# Altium PCB 数粒机接收板12通道.PcbDoc (part 1 of 5)
Units mm, origin at the board's own origin, x right, y up, seen from the top; angles counter-clockwise.
Board outline 316 x 52 mm, 2 copper layers (Top Layer, Bottom Layer); 209 components, 115 nets, 614 pads, 284 vias.
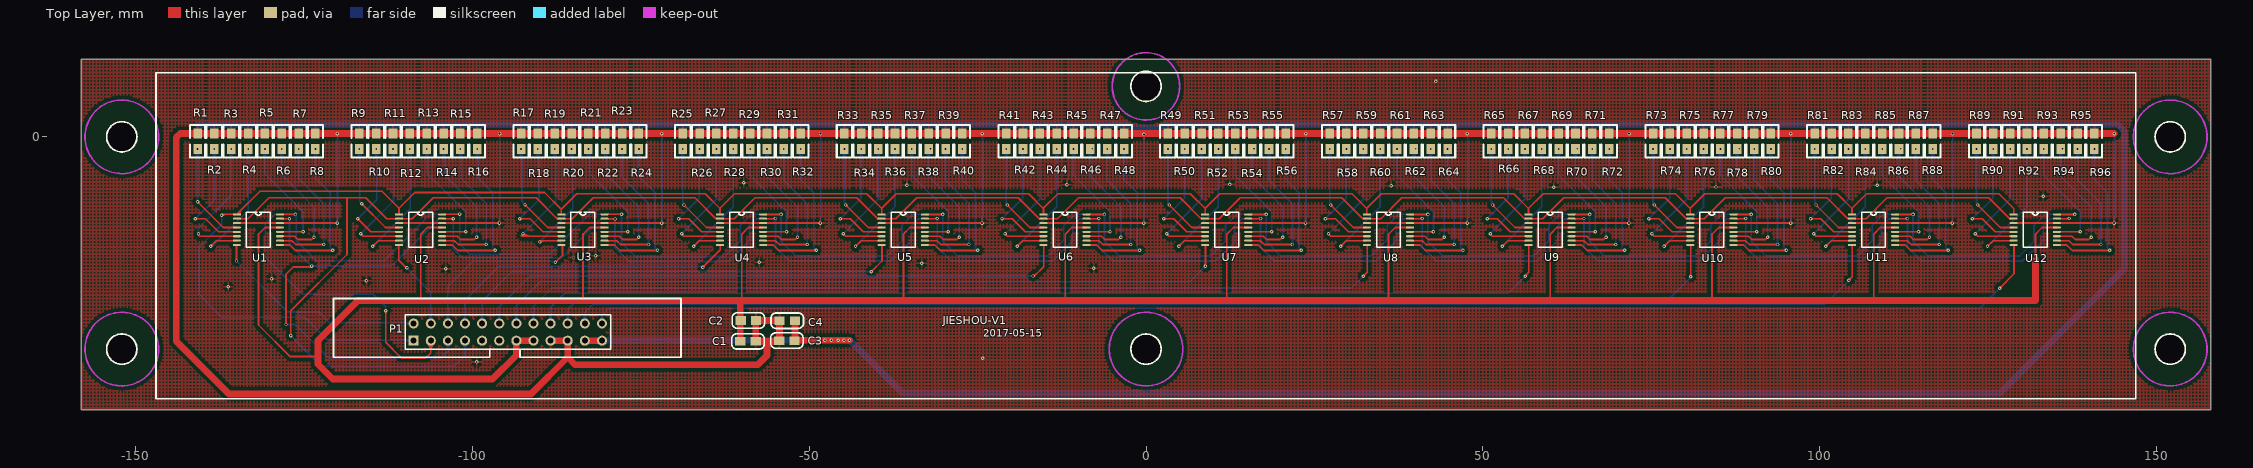
[diagram p0: Top Layer view]
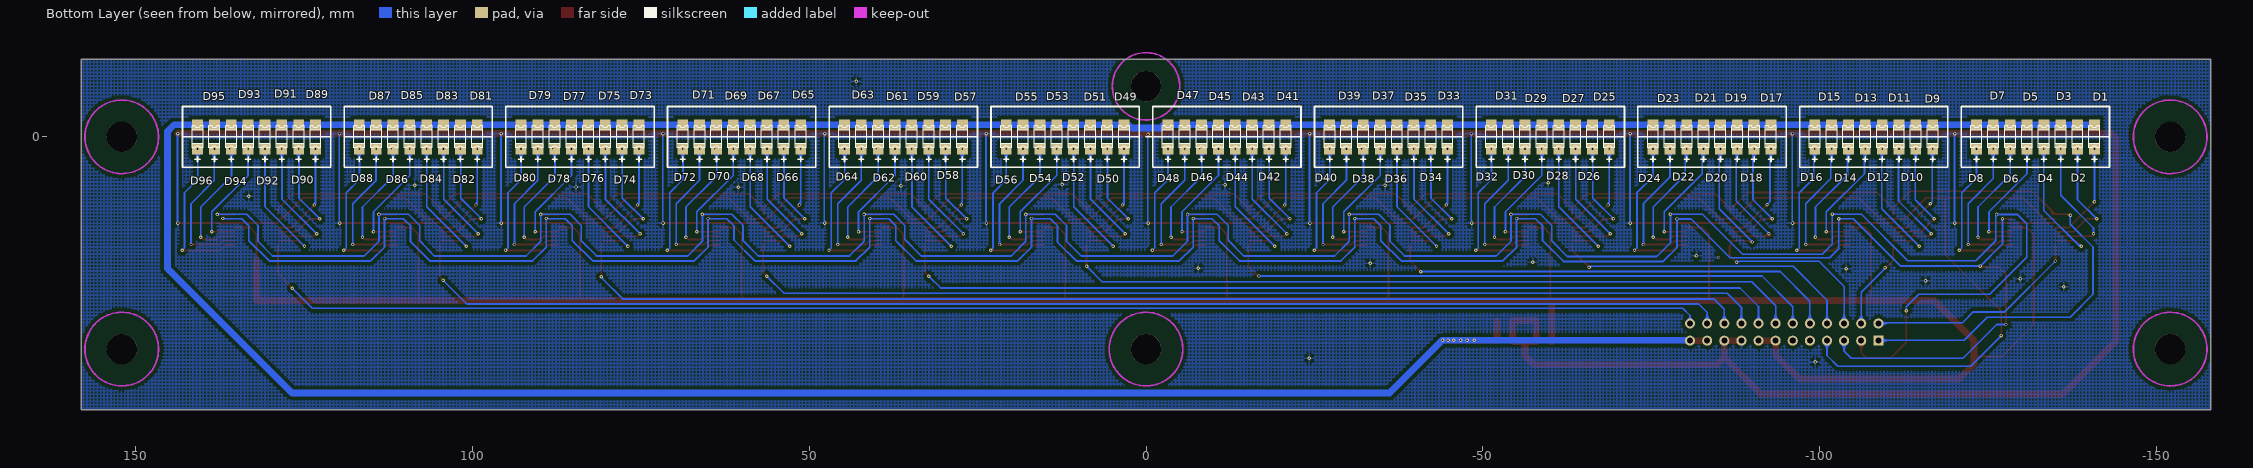
[diagram p1: Bottom Layer view, seen from below]

## Layer stack, top to bottom
Top Layer: signal copper 0.0356
Dielectric: dielectric 0.32, FR-4, Dk 4.8
Bottom Layer: signal copper 0.0356

## Board outline
-158,11.5 -158,-40.5 158,-40.5 158,11.5

## Design rules (kind name [scope] priority, off if disabled: settings)
Clearance Clearance_1 [InPolygon] p1: gap=0.508
Clearance [All] p2: gap=0.2
HoleSize [All] p1 off: absolutevalues=TRUE maxlimit=2.54 minlimit=0.025 maxpercent=80.000 minpercent=20.000
MinimumSolderMaskSliver [All] p1 off: minsoldermaskwidth=0.2
PolygonConnect [All] p1: connectstyle=Relief reliefconductorwidth=0.254 reliefentries=4 polygonreliefangle="90 Angle"
RoutingVias [All] p1: holewidth=0.254 width=0.508 viastyle="Through Hole" minholewidth=0.254 minwidth=0.508 maxholewidth=0.254 maxwidth=0.508
SilkToSilkClearance [All] p1: silktosilkclearance=-10
SilkscreenOverComponentPads [All] p1: minsilkscreentomaskgap=0
SolderMaskExpansion [All] p1: expansion=0.102
TestPointUsage [All] p1: valid=0 allowmultiple=FALSE
Testpoint [All] p1: side=3 testpointundercomponent=TRUE minsize=1.016 maxsize=2.54 preferedsize=1.524 minholesize=0 maxholesize=1.016 preferedholesize=0.813 testpointgrid=0.025 style=297 order=0123456789
Width [All] p1: maxlimit=2 minlimit=0.254 preferedwidth=0.254
20 further rules are at their usual default settings.

## Components (designator, comment, footprint, x,y, rotation, side; value= is the part's Value field where it differs from the comment)
C1 "贴片电容 10uf" 0805c -57.918,-30.357 r180 top
C2 "贴片电容" 0805c -57.868,-27.258 r180 top
C3 "贴片电容 10uf" 0805c -54.439,-30.23 r0 top
C4 "贴片电容" 0805c -54.388,-27.284 r0 top
D1 "红外接收珠子" jieshou1206 -140.75,-1.8 r0 bottom
D2 "红外接收珠子" jieshou1206 -138.25,-1.8 r0 bottom
D3 "红外接收珠子" jieshou1206 -135.75,-1.8 r0 bottom
D4 "红外接收珠子" jieshou1206 -133.25,-1.8 r0 bottom
D5 "红外接收珠子" jieshou1206 -130.75,-1.8 r0 bottom
D6 "红外接收珠子" jieshou1206 -128.25,-1.8 r0 bottom
D7 "红外接收珠子" jieshou1206 -125.75,-1.8 r0 bottom
D8 "红外接收珠子" jieshou1206 -123.25,-1.8 r0 bottom
D9 "红外接收珠子" jieshou1206 -116.75,-1.8 r0 bottom
D10 "红外接收珠子" jieshou1206 -114.25,-1.8 r0 bottom
D11 "红外接收珠子" jieshou1206 -111.75,-1.8 r0 bottom
D12 "红外接收珠子" jieshou1206 -109.25,-1.8 r0 bottom
D13 "红外接收珠子" jieshou1206 -106.75,-1.8 r0 bottom
D14 "红外接收珠子" jieshou1206 -104.25,-1.8 r0 bottom
D15 "红外接收珠子" jieshou1206 -101.75,-1.8 r0 bottom
D16 "红外接收珠子" jieshou1206 -99.25,-1.8 r0 bottom
D17 "红外接收珠子" jieshou1206 -92.75,-1.8 r0 bottom
D18 "红外接收珠子" jieshou1206 -90.25,-1.8 r0 bottom
D19 "红外接收珠子" jieshou1206 -87.75,-1.8 r0 bottom
D20 "红外接收珠子" jieshou1206 -85.25,-1.8 r0 bottom
D21 "红外接收珠子" jieshou1206 -82.75,-1.8 r0 bottom
D22 "红外接收珠子" jieshou1206 -80.25,-1.8 r0 bottom
D23 "红外接收珠子" jieshou1206 -77.75,-1.8 r0 bottom
D24 "红外接收珠子" jieshou1206 -75.25,-1.8 r0 bottom
D25 "红外接收珠子" jieshou1206 -68.75,-1.8 r0 bottom
D26 "红外接收珠子" jieshou1206 -66.25,-1.8 r0 bottom
D27 "红外接收珠子" jieshou1206 -63.75,-1.8 r0 bottom
D28 "红外接收珠子" jieshou1206 -61.25,-1.8 r0 bottom
D29 "红外接收珠子" jieshou1206 -58.75,-1.8 r0 bottom
D30 "红外接收珠子" jieshou1206 -56.25,-1.8 r0 bottom
D31 "红外接收珠子" jieshou1206 -53.75,-1.8 r0 bottom
D32 "红外接收珠子" jieshou1206 -51.25,-1.8 r0 bottom
D33 "红外接收珠子" jieshou1206 -44.75,-1.8 r0 bottom
D34 "红外接收珠子" jieshou1206 -42.25,-1.8 r0 bottom
D35 "红外接收珠子" jieshou1206 -39.75,-1.8 r0 bottom
D36 "红外接收珠子" jieshou1206 -37.25,-1.8 r0 bottom
D37 "红外接收珠子" jieshou1206 -34.75,-1.8 r0 bottom
D38 "红外接收珠子" jieshou1206 -32.25,-1.8 r0 bottom
D39 "红外接收珠子" jieshou1206 -29.75,-1.8 r0 bottom
D40 "红外接收珠子" jieshou1206 -27.25,-1.8 r0 bottom
D41 "红外接收珠子" jieshou1206 -20.75,-1.8 r0 bottom
D42 "红外接收珠子" jieshou1206 -18.25,-1.8 r0 bottom
D43 "红外接收珠子" jieshou1206 -15.75,-1.8 r0 bottom
D44 "红外接收珠子" jieshou1206 -13.25,-1.8 r0 bottom
D45 "红外接收珠子" jieshou1206 -10.75,-1.8 r0 bottom
D46 "红外接收珠子" jieshou1206 -8.25,-1.8 r0 bottom
D47 "红外接收珠子" jieshou1206 -5.75,-1.8 r0 bottom
D48 "红外接收珠子" jieshou1206 -3.25,-1.8 r0 bottom
D49 "红外接收珠子" jieshou1206 3.25,-1.8 r0 bottom
D50 "红外接收珠子" jieshou1206 5.75,-1.8 r0 bottom
D51 "红外接收珠子" jieshou1206 8.25,-1.8 r0 bottom
D52 "红外接收珠子" jieshou1206 10.75,-1.8 r0 bottom
D53 "红外接收珠子" jieshou1206 13.25,-1.8 r0 bottom
D54 "红外接收珠子" jieshou1206 15.75,-1.8 r0 bottom
D55 "红外接收珠子" jieshou1206 18.25,-1.8 r0 bottom
D56 "红外接收珠子" jieshou1206 20.75,-1.8 r0 bottom
D57 "红外接收珠子" jieshou1206 27.25,-1.8 r0 bottom
D58 "红外接收珠子" jieshou1206 29.75,-1.8 r0 bottom
D59 "红外接收珠子" jieshou1206 32.25,-1.8 r0 bottom
D60 "红外接收珠子" jieshou1206 34.75,-1.8 r0 bottom
D61 "红外接收珠子" jieshou1206 37.25,-1.8 r0 bottom
D62 "红外接收珠子" jieshou1206 39.75,-1.8 r0 bottom
D63 "红外接收珠子" jieshou1206 42.25,-1.8 r0 bottom
D64 "红外接收珠子" jieshou1206 44.75,-1.8 r0 bottom
D65 "红外接收珠子" jieshou1206 51.25,-1.8 r0 bottom
D66 "红外接收珠子" jieshou1206 53.75,-1.8 r0 bottom
D67 "红外接收珠子" jieshou1206 56.25,-1.8 r0 bottom
D68 "红外接收珠子" jieshou1206 58.75,-1.8 r0 bottom
D69 "红外接收珠子" jieshou1206 61.25,-1.8 r0 bottom
D70 "红外接收珠子" jieshou1206 63.75,-1.8 r0 bottom
D71 "红外接收珠子" jieshou1206 66.25,-1.8 r0 bottom
D72 "红外接收珠子" jieshou1206 68.75,-1.8 r0 bottom
D73 "红外接收珠子" jieshou1206 75.25,-1.8 r0 bottom
D74 "红外接收珠子" jieshou1206 77.75,-1.8 r0 bottom
D75 "红外接收珠子" jieshou1206 80.25,-1.8 r0 bottom
D76 "红外接收珠子" jieshou1206 82.75,-1.8 r0 bottom
D77 "红外接收珠子" jieshou1206 85.25,-1.8 r0 bottom
D78 "红外接收珠子" jieshou1206 87.75,-1.8 r0 bottom
D79 "红外接收珠子" jieshou1206 90.25,-1.8 r0 bottom
D80 "红外接收珠子" jieshou1206 92.75,-1.8 r0 bottom
D81 "红外接收珠子" jieshou1206 99.25,-1.8 r0 bottom
D82 "红外接收珠子" jieshou1206 101.75,-1.8 r0 bottom
D83 "红外接收珠子" jieshou1206 104.25,-1.8 r0 bottom
D84 "红外接收珠子" jieshou1206 106.75,-1.8 r0 bottom
D85 "红外接收珠子" jieshou1206 109.25,-1.8 r0 bottom
D86 "红外接收珠子" jieshou1206 111.75,-1.8 r0 bottom
D87 "红外接收珠子" jieshou1206 114.25,-1.8 r0 bottom
D88 "红外接收珠子" jieshou1206 116.75,-1.8 r0 bottom
D89 "红外接收珠子" jieshou1206 123.25,-1.8 r0 bottom
D90 "红外接收珠子" jieshou1206 125.75,-1.8 r0 bottom
D91 "红外接收珠子" jieshou1206 128.25,-1.8 r0 bottom
D92 "红外接收珠子" jieshou1206 130.75,-1.8 r0 bottom
D93 "红外接收珠子" jieshou1206 133.25,-1.8 r0 bottom
D94 "红外接收珠子" jieshou1206 135.75,-1.8 r0 bottom
D95 "红外接收珠子" jieshou1206 138.25,-1.8 r0 bottom
D96 "红外接收珠子" jieshou1206 140.75,-1.8 r0 bottom
P1 "牛角插座" HDR2X12 -108.682,-30.248 r0 top
R1 "贴片电阻" 0805r -140.758,0.486 r270 top
R2 "贴片电阻" 0805r -138.258,0.486 r270 top
R3 "贴片电阻" 0805r -135.758,0.486 r270 top
R4 "贴片电阻" 0805r -133.258,0.486 r270 top
R5 "贴片电阻" 0805r -130.758,0.486 r270 top
R6 "贴片电阻" 0805r -128.258,0.486 r270 top
R7 "贴片电阻" 0805r -125.758,0.486 r270 top
R8 "贴片电阻" 0805r -123.258,0.486 r270 top
R9 "贴片电阻" 0805r -116.75,0.486 r270 top
R10 "贴片电阻" 0805r -114.25,0.486 r270 top
R11 "贴片电阻" 0805r -111.75,0.486 r270 top
R12 "贴片电阻" 0805r -109.25,0.486 r270 top
R13 "贴片电阻" 0805r -106.75,0.486 r270 top
R14 "贴片电阻" 0805r -104.25,0.486 r270 top
R15 "贴片电阻" 0805r -101.75,0.486 r270 top
R16 "贴片电阻" 0805r -99.25,0.486 r270 top
R17 "贴片电阻" 0805r -92.75,0.486 r270 top
R18 "贴片电阻" 0805r -90.25,0.486 r270 top
R19 "贴片电阻" 0805r -87.75,0.486 r270 top
R20 "贴片电阻" 0805r -85.25,0.486 r270 top
R21 "贴片电阻" 0805r -82.75,0.486 r270 top
R22 "贴片电阻" 0805r -80.25,0.486 r270 top
R23 "贴片电阻" 0805r -77.75,0.486 r270 top
R24 "贴片电阻" 0805r -75.25,0.486 r270 top
R25 "贴片电阻" 0805r -68.75,0.486 r270 top
R26 "贴片电阻" 0805r -66.25,0.486 r270 top
R27 "贴片电阻" 0805r -63.75,0.486 r270 top
R28 "贴片电阻" 0805r -61.25,0.486 r270 top
R29 "贴片电阻" 0805r -58.75,0.486 r270 top
R30 "贴片电阻" 0805r -56.25,0.486 r270 top
R31 "贴片电阻" 0805r -53.75,0.486 r270 top
R32 "贴片电阻" 0805r -51.25,0.486 r270 top
R33 "贴片电阻" 0805r -44.75,0.486 r270 top
R34 "贴片电阻" 0805r -42.25,0.486 r270 top
R35 "贴片电阻" 0805r -39.75,0.486 r270 top
R36 "贴片电阻" 0805r -37.25,0.486 r270 top
R37 "贴片电阻" 0805r -34.75,0.486 r270 top
R38 "贴片电阻" 0805r -32.25,0.486 r270 top
R39 "贴片电阻" 0805r -29.75,0.486 r270 top
R40 "贴片电阻" 0805r -27.25,0.486 r270 top
R41 "贴片电阻" 0805r -20.75,0.486 r270 top
R42 "贴片电阻" 0805r -18.25,0.486 r270 top
R43 "贴片电阻" 0805r -15.75,0.486 r270 top
R44 "贴片电阻" 0805r -13.25,0.486 r270 top
R45 "贴片电阻" 0805r -10.75,0.486 r270 top
R46 "贴片电阻" 0805r -8.25,0.486 r270 top
R47 "贴片电阻" 0805r -5.75,0.486 r270 top
R48 "贴片电阻" 0805r -3.25,0.486 r270 top
R49 "贴片电阻" 0805r 3.25,0.486 r270 top
R50 "贴片电阻" 0805r 5.75,0.486 r270 top
R51 "贴片电阻" 0805r 8.25,0.486 r270 top
R52 "贴片电阻" 0805r 10.75,0.486 r270 top
R53 "贴片电阻" 0805r 13.25,0.486 r270 top
R54 "贴片电阻" 0805r 15.75,0.486 r270 top
R55 "贴片电阻" 0805r 18.25,0.486 r270 top
R56 "贴片电阻" 0805r 20.75,0.486 r270 top
R57 "贴片电阻" 0805r 27.25,0.486 r270 top
R58 "贴片电阻" 0805r 29.75,0.486 r270 top
R59 "贴片电阻" 0805r 32.25,0.486 r270 top
R60 "贴片电阻" 0805r 34.75,0.486 r270 top
R61 "贴片电阻" 0805r 37.25,0.486 r270 top
R62 "贴片电阻" 0805r 39.75,0.486 r270 top
R63 "贴片电阻" 0805r 42.25,0.486 r270 top
R64 "贴片电阻" 0805r 44.75,0.486 r270 top
R65 "贴片电阻" 0805r 51.242,0.486 r270 top
R66 "贴片电阻" 0805r 53.742,0.486 r270 top
R67 "贴片电阻" 0805r 56.242,0.486 r270 top
R68 "贴片电阻" 0805r 58.742,0.486 r270 top
R69 "贴片电阻" 0805r 61.242,0.486 r270 top
R70 "贴片电阻" 0805r 63.742,0.486 r270 top
R71 "贴片电阻" 0805r 66.242,0.486 r270 top
R72 "贴片电阻" 0805r 68.742,0.486 r270 top
R73 "贴片电阻" 0805r 75.25,0.486 r270 top
R74 "贴片电阻" 0805r 77.75,0.486 r270 top
R75 "贴片电阻" 0805r 80.25,0.486 r270 top
R76 "贴片电阻" 0805r 82.75,0.486 r270 top
R77 "贴片电阻" 0805r 85.25,0.486 r270 top
R78 "贴片电阻" 0805r 87.75,0.486 r270 top
R79 "贴片电阻" 0805r 90.25,0.486 r270 top
R80 "贴片电阻" 0805r 92.75,0.486 r270 top
R81 "贴片电阻" 0805r 99.25,0.486 r270 top
R82 "贴片电阻" 0805r 101.75,0.486 r270 top
R83 "贴片电阻" 0805r 104.25,0.486 r270 top
R84 "贴片电阻" 0805r 106.75,0.486 r270 top
R85 "贴片电阻" 0805r 109.25,0.486 r270 top
R86 "贴片电阻" 0805r 111.75,0.486 r270 top
R87 "贴片电阻" 0805r 114.25,0.486 r270 top
R88 "贴片电阻" 0805r 116.75,0.486 r270 top
R89 "贴片电阻" 0805r 123.25,0.486 r270 top
R90 "贴片电阻" 0805r 125.75,0.486 r270 top
R91 "贴片电阻" 0805r 128.25,0.486 r270 top
R92 "贴片电阻" 0805r 130.75,0.486 r270 top
R93 "贴片电阻" 0805r 133.25,0.486 r270 top
R94 "贴片电阻" 0805r 135.75,0.486 r270 top
R95 "贴片电阻" 0805r 138.25,0.486 r270 top
R96 "贴片电阻" 0805r 140.75,0.486 r270 top
U1 "集成电路" TSSOP16 -134.931,-11.5 r0 top
U2 "集成电路" TSSOP16 -110.852,-11.5 r0 top
U3 "集成电路" TSSOP16 -86.773,-11.5 r0 top
U4 "集成电路" TSSOP16 -63.227,-11.5 r0 top
U5 "集成电路" TSSOP16 -39.227,-11.5 r0 top
U6 "集成电路" TSSOP16 -15.227,-11.5 r0 top
U7 "集成电路" TSSOP16 8.773,-11.5 r0 top
U8 "集成电路" TSSOP16 32.773,-11.5 r0 top
U9 "集成电路" TSSOP16 56.773,-11.5 r0 top
U10 "集成电路" TSSOP16 80.773,-11.5 r0 top
U11 "集成电路" TSSOP16 104.773,-11.5 r0 top
U12 "集成电路" TSSOP16 128.773,-11.5 r0 top

## Footprints (in the part's own frame and the unit in brackets; to place one, negate y for a bottom-side part, rotate by r counter-clockwise, add the part's x,y. Pads: shape width x height; smd on the part's side, far side on the other; paste and mask are expansions set on the pad)
0805c [mil]
  rect 60x50 smd: 1(0,0) 2(90,0)
  silkscreen extent -50,-45 140,45
0805r [mil]
  rect 60x50 smd: 1(0,0) 2(90,0)
  silkscreen extent -50,-45 140,45
HDR2X12 [mm] "Connector; Header; 12x2 Position"
  rect 1.5x1.5 hole 0.9: 1(0,0)
  round 1.5 hole 0.9: 2(0,2.54) 3(2.54,0) 4(2.54,2.54) 5(5.08,0) 6(5.08,2.54) 7(7.62,0) 8(7.62,2.54) 9(10.16,0) 10(10.16,2.54) 11(12.7,0) 12(12.7,2.54) 13(15.24,0) 14(15.24,2.54) 15(17.78,0) 16(17.78,2.54) 17(20.32,0) 18(20.32,2.54) 19(22.86,0) 20(22.86,2.54) 21(25.4,0) 22(25.4,2.54) 23(27.94,0) 24(27.94,2.54)
  silkscreen extent -1.27,-1.27 29.21,3.81
jieshou1206 [mm]
  rect 1.6x1.6 smd: 1(0,0) 2(0,-3.6)
  silkscreen extent -0.8,-3.41 0.82,1.9
TSSOP16 [mm] "ADG708"
  rect 1.2x0.3 smd: 1(0,0)
  oval 1.2x0.3 smd: 2(0,-0.65) 3(0,-1.3) 4(0,-1.95) 5(0,-2.6) 6(0,-3.25) 7(0,-3.9) 8(0,-4.55) 9(6.4,-4.55) 10(6.4,-3.9) 11(6.4,-3.25) 12(6.4,-2.6) 13(6.4,-1.95) 14(6.4,-1.3) 15(6.4,-0.65) 16(6.4,0)
  silkscreen extent 1.43,-4.88 4.96,0.33

## Part data
C1 C2 C3 C4: library part Cap, "Capacitor"
D1 D2 D3 D4 D5 D6 D7 D8 D9 D10 D11 D12 D13 D14 D15 D16 D17 D18 D19 D20 D21 D22 D23 D24 D25 D26 D27 D28 D29 D30 D31 D32 D33 D34 D35 D36 D37 D38 D39 D40 D41 D42 D43 D44 D45 D46 D47 D48 D49 D50 D51 D52 D53 D54 D55 D56 D57 D58 D59 D60 D61 D62 D63 D64 D65 D66 D67 D68 D69 D70 D71 D72 D73 D74 D75 D76 D77 D78 D79 D80 D81 D82 D83 D84 D85 D86 D87 D88 D89 D90 D91 D92 D93 D94 D95 D96: library part LED0, "PD15-21B/TR8"
P1: library part "Header 12X2", "Header, 12-Pin, Dual row"
R1 R2 R3 R4 R5 R6 R7 R8 R9 R10 R11 R12 R13 R14 R15 R16 R17 R18 R19 R20 R21 R22 R23 R24 R25 R26 R27 R28 R29 R30 R31 R32: library part Res3
R33 R34 R35 R36 R37 R38 R39 R40 R41 R42 R43 R44 R45 R46 R47 R48 R49 R50 R51 R52 R53 R54 R55 R56 R57 R58 R59 R60 R61 R62 R63 R64 R65 R66 R67 R68 R69 R70 R71 R72 R73 R74 R75 R76 R77 R78 R79 R80 R81 R82 R83 R84 R85 R86 R87 R88 R89 R90 R91 R92 R93 R94 R95 R96: library part Res3, "电阻"
U1 U2 U3 U4: library part ADG708
U5 U6 U7 U8 U9 U10 U11 U12: library part ADG708, "ADG708BRU-REEL"

## Free pads (board coordinates)
  round 4.5 hole 4.5 unplated: 1(-152,0) 2(-152,-31.5) 2(0,-31.5) 2(0,7.5) 5(152,0) 6(152,-31.5)

## Via types
v1: diameter 0.508, hole 0.254, Top Layer to Bottom Layer, 284 vias

## Nets (pads, with @x,y where several pads share a name; then routed paths per layer and width w, separated by ;. In a path a pad name is that pad's centre, name@x,y a point inside that pad or via, vN(x,y) a via of type N, cw(c..) or ccw(c..) an arc to the next point about the centre after c; other vN are vias at no path point)
A0: P1.1 U1.1 U2.1 U3.1 U4.1 U5.1 U6.1 U7.1 U8.1 U9.1 U10.1 U11.1 U12.1 | length 365.9
  Top Layer w0.254: v1(-137.192,-11.637) -137.055,-11.5 U1.1@-134.931,-11.5 -131.487,-8.056 -113.392,-8.056 -110.852,-10.596 ; U2.1@-110.852,-11.5 -110.852,-10.596 ; U3.1@-86.773,-11.5 -86.773,-10.748 ; U4.1@-63.227,-11.5 -63.227,-10.6 -61.064,-8.437 -41.418,-8.437 -39.227,-10.628 ; -63.227,-10.628 -65.418,-8.437 -84.461,-8.437 -86.773,-10.748 ; -15.227,-10.628 -17.418,-8.437 -37.064,-8.437 -39.227,-10.6 ; 8.773,-10.628 6.582,-8.437 -13.064,-8.437 -15.227,-10.6 ; 32.773,-10.628 30.582,-8.437 10.936,-8.437 8.773,-10.6 ; 56.773,-10.628 54.582,-8.437 34.936,-8.437 32.773,-10.6 ; 80.773,-10.628 78.582,-8.437 58.936,-8.437 56.773,-10.6 ; 104.773,-10.628 102.582,-8.437 82.936,-8.437 80.773,-10.6 ; U12.1@128.773,-11.5 128.773,-10.6 ; 128.773,-10.628 126.582,-8.437 106.936,-8.437 104.773,-10.6 ; v1@-137.102,-11.727 cw(c-136.554,-12.275) -136.554,-11.5 ; v1@-137.102,-11.727 cw(c-136.554,-12.275) -136.554,-11.5 ; v1@-137.102,-11.727 cw(c-136.554,-12.275) -136.554,-11.5 ; -110.852,-10.596 -108.515,-8.259 -89.262,-8.259 -86.773,-10.748 ; -39.227,-10.6 U5.1@-39.227,-11.5 -39.227,-10.6 ; -15.227,-10.6 U6.1@-15.227,-11.5 -15.227,-10.6 ; 8.773,-10.6 U7.1@8.773,-11.5 8.773,-10.6 ; 32.773,-10.6 U8.1@32.773,-11.5 32.773,-10.6 ; 56.773,-10.6 U9.1@56.773,-11.5 56.773,-10.6 ; 80.773,-10.6 U10.1@80.773,-11.5 80.773,-10.6 ; 104.773,-10.6 U11.1@104.773,-11.5 104.773,-10.6 ; U1.1@-134.712,-11.5 cw(c-134.184,-11.5) -134.557,-11.126 ccw(c-134.184,-11.5) U1.1@-134.712,-11.5 ; U1.1@-134.458,-11.5 cw(c-133.316,-11.5) -134.124,-10.693 ccw(c-133.316,-11.5) U1.1@-134.458,-11.5
  Bottom Layer w0.254: v1(-137.192,-11.637) -137.166,-11.663 -137.166,-12.958 -140.545,-16.336 -140.545,-23.372 -137.141,-26.776 -124.854,-26.776 -121.458,-30.172 P1.1@-108.682,-30.172 ; v1@-137.282,-11.727 cw(c-137.56,-12.005) -137.166,-12.005 ; v1@-137.282,-11.727 cw(c-137.56,-12.005) -137.166,-12.005 ; v1@-137.282,-11.727 cw(c-137.56,-12.005) -137.166,-12.005 ; -110.37,-30.172 cw(c-110.37,-31.936) P1.1@-109.122,-30.689 ; -110.37,-30.172 cw(c-110.37,-31.936) P1.1@-109.122,-30.689 ; -110.37,-30.172 cw(c-110.37,-31.936) P1.1@-109.122,-30.689 ; -110.002,-30.172 ccw(c-110.002,-28.928) P1.1@-109.122,-29.807 ; -110.002,-30.172 ccw(c-110.002,-28.928) P1.1@-109.122,-29.807 ; -110.002,-30.172 ccw(c-110.002,-28.928) P1.1@-109.122,-29.807 ; -109.757,-30.172 cw(c-109.757,-31.323) P1.1@-108.943,-30.509 ; -109.757,-30.172 cw(c-109.757,-31.323) P1.1@-108.943,-30.509 ; -109.757,-30.172 cw(c-109.757,-31.323) P1.1@-108.943,-30.509
A1: P1.3 U1.16 U2.16 U3.16 U4.16 U5.16 U6.16 U7.16 U8.16 U9.16 U10.16 U11.16 U12.16 | length 486.3
  Top Layer w0.254: U1.16@-128.531,-11.5 -126.229,-11.5 v1(-126.219,-11.51) ; v1(-112.847,-25.828) -112.847,-30.502 -110.536,-32.813 -106.878,-32.813 -106.142,-32.077 P1.3@-106.142,-30.248 ; U2.16@-104.452,-11.5 v1@-101.921,-11.5 ; U3.16@-80.373,-11.5 -77.847,-11.5 v1(-77.832,-11.485) ; U4.16@-56.827,-11.5 -56.817,-11.51 v1(-54.159,-11.51) ; U5.16@-32.827,-11.5 -32.817,-11.51 v1(-30.159,-11.51) ; U6.16@-8.827,-11.5 -8.817,-11.51 v1(-6.159,-11.51) ; U7.16@15.173,-11.5 15.183,-11.51 v1(17.841,-11.51) ; U8.16@39.173,-11.5 39.183,-11.51 v1(41.841,-11.51) ; U9.16@63.173,-11.5 63.183,-11.51 v1(65.841,-11.51) ; U10.16@87.173,-11.5 87.183,-11.51 v1(89.841,-11.51) ; U11.16@111.173,-11.5 111.183,-11.51 v1(113.841,-11.51) ; U12.16@135.173,-11.5 135.183,-11.51 v1(137.841,-11.51) ; v1@-112.937,-25.918 cw(c-113.154,-26.135) -112.847,-26.135 ; v1@-112.937,-25.918 cw(c-113.154,-26.135) -112.847,-26.135 ; v1@-112.937,-25.918 cw(c-113.154,-26.135) -112.847,-26.135 ; -112.847,-26.135 cw(c-112.541,-26.135) v1@-112.758,-25.918 ; -112.847,-26.135 cw(c-112.541,-26.135) v1@-112.758,-25.918 ; -112.847,-26.135 cw(c-112.541,-26.135) v1@-112.758,-25.918 ; P1.3@-106.582,-30.689 cw(c-107.646,-31.752) -106.142,-31.752 ; P1.3@-106.582,-30.689 cw(c-107.646,-31.752) -106.142,-31.752 ; P1.3@-106.582,-30.689 cw(c-107.646,-31.752) -106.142,-31.752 ; P1.3@-106.403,-30.509 cw(c-107.033,-31.139) -106.142,-31.139 ; P1.3@-106.403,-30.509 cw(c-107.033,-31.139) -106.142,-31.139 ; P1.3@-106.403,-30.509 cw(c-107.033,-31.139) -106.142,-31.139 ; -106.142,-31.752 cw(c-104.638,-31.752) P1.3@-105.701,-30.689 ; -106.142,-31.752 cw(c-104.638,-31.752) P1.3@-105.701,-30.689 ; -106.142,-31.752 cw(c-104.638,-31.752) P1.3@-105.701,-30.689 ; -106.142,-31.139 cw(c-105.251,-31.139) P1.3@-105.881,-30.509 ; -106.142,-31.139 cw(c-105.251,-31.139) P1.3@-105.881,-30.509 ; -106.142,-31.139 cw(c-105.251,-31.139) P1.3@-105.881,-30.509 ; -78.175,-11.5 ccw(c-78.175,-11.142) v1@-77.922,-11.395 ; -78.175,-11.5 ccw(c-78.175,-11.142) v1@-77.922,-11.395 ; -78.175,-11.5 ccw(c-78.175,-11.142) v1@-77.922,-11.395 ; -78.102,-11.5 cw(c-78.102,-11.755) v1@-77.922,-11.575 ; -78.102,-11.5 cw(c-78.102,-11.755) v1@-77.922,-11.575 ; -78.102,-11.5 cw(c-78.102,-11.755) v1@-77.922,-11.575 ; -54.466,-11.51 cw(c-54.466,-11.817) -54.249,-11.6 ccw(c-54.466,-11.817) -54.466,-11.51 ; -54.466,-11.51 ccw(c-54.466,-11.204) -54.249,-11.42 cw(c-54.466,-11.204) -54.466,-11.51 ; -30.466,-11.51 cw(c-30.466,-11.817) -30.249,-11.6 ccw(c-30.466,-11.817) -30.466,-11.51 ; -30.466,-11.51 ccw(c-30.466,-11.204) -30.249,-11.42 cw(c-30.466,-11.204) -30.466,-11.51 ; -6.466,-11.51 cw(c-6.466,-11.817) -6.249,-11.6 ccw(c-6.466,-11.817) -6.466,-11.51 ; -6.466,-11.51 ccw(c-6.466,-11.204) -6.249,-11.42 cw(c-6.466,-11.204) -6.466,-11.51 ; 17.534,-11.51 cw(c17.534,-11.817) 17.751,-11.6 ccw(c17.534,-11.817) 17.534,-11.51 ; 17.534,-11.51 ccw(c17.534,-11.204) 17.751,-11.42 cw(c17.534,-11.204) 17.534,-11.51 ; 41.534,-11.51 cw(c41.534,-11.817) 41.751,-11.6 ccw(c41.534,-11.817) 41.534,-11.51 ; 41.534,-11.51 ccw(c41.534,-11.204) 41.751,-11.42 cw(c41.534,-11.204) 41.534,-11.51 ; 65.534,-11.51 cw(c65.534,-11.817) 65.751,-11.6 ccw(c65.534,-11.817) 65.534,-11.51 ; 65.534,-11.51 ccw(c65.534,-11.204) 65.751,-11.42 cw(c65.534,-11.204) 65.534,-11.51 ; 89.534,-11.51 cw(c89.534,-11.817) 89.751,-11.6 ccw(c89.534,-11.817) 89.534,-11.51 ; 89.534,-11.51 ccw(c89.534,-11.204) 89.751,-11.42 cw(c89.534,-11.204) 89.534,-11.51 ; 113.534,-11.51 cw(c113.534,-11.817) 113.751,-11.6 ccw(c113.534,-11.817) 113.534,-11.51 ; 113.534,-11.51 ccw(c113.534,-11.204) 113.751,-11.42 cw(c113.534,-11.204) 113.534,-11.51 ; 137.534,-11.51 cw(c137.534,-11.817) 137.751,-11.6 ccw(c137.534,-11.817) 137.534,-11.51 ; 137.534,-11.51 ccw(c137.534,-11.204) 137.751,-11.42 cw(c137.534,-11.204) 137.534,-11.51 ; -126.55,-11.5 cw(c-126.55,-11.841) -126.309,-11.6 ccw(c-126.55,-11.841) -126.55,-11.5 ; -126.501,-11.5 ccw(c-126.501,-11.228) -126.309,-11.42 cw(c-126.501,-11.228) -126.501,-11.5 ; -102.265,-11.5 ccw(c-102.265,-11.055) -101.95,-11.37 cw(c-102.265,-11.055) -102.265,-11.5
  Bottom Layer w0.254: v1(-112.847,-25.828) -112.847,-25.205 -114.68,-23.372 -125.203,-23.372 -130.689,-17.886 -130.689,-12.907 -129.292,-11.51 v1(-126.219,-11.51) -126.092,-11.637 -126.092,-15.396 -123.12,-18.368 -113.062,-18.368 -106.194,-11.5 -101.901,-11.5 v1(-101.86,-11.459) -101.86,-15.904 -100.34,-17.425 -88.522,-17.425 -82.582,-11.485 v1(-77.832,-11.485) -77.832,-15.701 -75.782,-17.751 -62.534,-17.751 -60.204,-15.422 -60.204,-13.161 -58.543,-11.5 v1@-54.169,-11.5 ; v1@-54.169,-11.51 v1@-54.169,-11.5 ; v1(-30.159,-11.51) v1@-30.169,-11.5 ; v1(-6.159,-11.51) v1@-6.169,-11.5 ; v1(17.841,-11.51) v1@17.831,-11.5 ; v1(41.841,-11.51) v1@41.831,-11.5 ; v1(65.841,-11.51) v1@65.831,-11.5 ; v1(89.841,-11.51) v1@89.831,-11.5 ; v1(113.841,-11.51) v1@113.831,-11.5 ; v1(137.841,-11.51) 137.831,-11.5 133.457,-11.5 131.796,-13.161 131.796,-15.505 129.625,-17.675 116.018,-17.675 113.831,-15.488 v1@113.831,-11.5 ; -126.526,-11.51 cw(c-126.526,-11.817) v1@-126.309,-11.6 ; -126.526,-11.51 ccw(c-126.526,-11.204) -126.309,-11.42 cw(c-126.526,-11.204) -126.526,-11.51 ; -126.526,-11.51 cw(c-126.526,-11.817) v1@-126.309,-11.6 ; v1@-126.309,-11.6 cw(c-126.832,-12.123) -126.092,-12.123 ; v1@-126.309,-11.6 cw(c-126.832,-12.123) -126.092,-12.123 ; v1@-126.309,-11.6 cw(c-126.832,-12.123) -126.092,-12.123 ; v1@-112.937,-25.739 ccw(c-113.154,-25.522) -112.847,-25.522 ; v1@-112.937,-25.739 ccw(c-113.154,-25.522) -112.847,-25.522 ; v1@-112.937,-25.739 ccw(c-113.154,-25.522) -112.847,-25.522 ; -112.847,-25.522 ccw(c-112.541,-25.522) v1@-112.758,-25.739 ; -112.847,-25.522 ccw(c-112.541,-25.522) v1@-112.758,-25.739 ; -112.847,-25.522 ccw(c-112.541,-25.522) v1@-112.758,-25.739 ; v1@-101.95,-11.549 cw(c-102.167,-11.766) -101.86,-11.766 ; v1@-101.95,-11.549 cw(c-102.167,-11.766) -101.86,-11.766 ; v1@-101.95,-11.549 cw(c-102.167,-11.766) -101.86,-11.766 ; -101.86,-11.766 cw(c-101.554,-11.766) v1@-101.771,-11.549 ; -101.86,-11.766 cw(c-101.554,-11.766) v1@-101.771,-11.549 ; -101.86,-11.766 cw(c-101.554,-11.766) v1@-101.771,-11.549 ; -78.139,-11.485 cw(c-78.139,-11.791) v1@-77.922,-11.575 ; -78.139,-11.485 ccw(c-78.139,-11.178) v1@-77.922,-11.395 ; -78.139,-11.485 cw(c-78.139,-11.791) v1@-77.922,-11.575 ; -78.139,-11.485 ccw(c-78.139,-11.178) v1@-77.922,-11.395 ; -78.139,-11.485 ccw(c-78.139,-11.178) v1@-77.922,-11.395 ; -78.139,-11.485 cw(c-78.139,-11.791) v1@-77.922,-11.575 ; v1@-77.922,-11.575 cw(c-78.139,-11.791) -77.832,-11.791 ; v1@-77.922,-11.575 cw(c-78.139,-11.791) -77.832,-11.791 ; v1@-77.922,-11.575 cw(c-78.139,-11.791) -77.832,-11.791 ; -77.832,-11.791 cw(c-77.525,-11.791) v1@-77.742,-11.575 ; -77.832,-11.791 cw(c-77.525,-11.791) v1@-77.742,-11.575 ; -77.832,-11.791 cw(c-77.525,-11.791) v1@-77.742,-11.575 ; v1@-54.249,-11.6 cw(c-54.466,-11.817) -54.159,-11.817 ; v1@-54.249,-11.6 ccw(c-54.49,-11.841) -54.49,-11.5 cw(c-54.49,-11.841) v1@-54.249,-11.6 ; v1@-54.249,-11.6 cw(c-54.466,-11.817) -54.159,-11.817 ; v1@-54.169,-11.5 v1(-54.159,-11.51) -54.159,-15.478 -54.169,-15.488 -51.982,-17.675 -38.375,-17.675 -36.204,-15.505 -36.204,-13.161 -34.543,-11.5 v1@-30.169,-11.5 ; -54.159,-11.817 cw(c-53.853,-11.817) -54.069,-11.6 ccw(c-53.853,-11.817) -54.159,-11.817 ; v1@-30.249,-11.6 ccw(c-30.49,-11.841) -30.49,-11.5 cw(c-30.49,-11.841) v1@-30.249,-11.6 ; v1@-30.249,-11.6 cw(c-30.441,-11.792) -30.169,-11.792 ccw(c-30.441,-11.792) v1@-30.249,-11.6 ; v1@-30.169,-11.5 -30.169,-15.488 -27.982,-17.675 -14.524,-17.675 -12.204,-15.355 -12.204,-13.161 -10.543,-11.5 v1@-6.169,-11.5 ; v1@-6.249,-11.6 ccw(c-6.49,-11.841) -6.49,-11.5 cw(c-6.49,-11.841) v1@-6.249,-11.6 ; v1@-6.249,-11.6 cw(c-6.441,-11.792) -6.169,-11.792 ccw(c-6.441,-11.792) v1@-6.249,-11.6 ; v1@-6.169,-11.5 -6.169,-15.488 -3.982,-17.675 9.603,-17.675 11.796,-15.482 11.796,-13.161 13.457,-11.5 v1@17.831,-11.5 ; v1@17.751,-11.6 ccw(c17.51,-11.841) 17.51,-11.5 cw(c17.51,-11.841) v1@17.751,-11.6 ; v1@17.751,-11.6 cw(c17.559,-11.792) 17.831,-11.792 ccw(c17.559,-11.792) v1@17.751,-11.6 ; v1@17.831,-11.5 17.831,-15.488 20.018,-17.675 33.33,-17.675 35.796,-15.209 35.796,-13.161 37.457,-11.5 v1@41.831,-11.5 ; v1@41.751,-11.6 ccw(c41.51,-11.841) 41.51,-11.5 cw(c41.51,-11.841) v1@41.751,-11.6 ; v1@41.751,-11.6 cw(c41.559,-11.792) 41.831,-11.792 ccw(c41.559,-11.792) v1@41.751,-11.6 ; v1@41.831,-11.5 41.831,-15.488 44.018,-17.675 57.536,-17.675 59.796,-15.415 59.796,-13.161 61.457,-11.5 v1@65.831,-11.5 ; v1@65.751,-11.6 cw(c65.559,-11.792) 65.831,-11.792 ccw(c65.559,-11.792) v1@65.751,-11.6 ; v1@65.751,-11.6 ccw(c65.51,-11.841) 65.51,-11.5 cw(c65.51,-11.841) v1@65.751,-11.6 ; v1@65.831,-11.5 65.831,-15.488 68.018,-17.675 81.539,-17.675 83.796,-15.418 83.796,-13.161 85.457,-11.5 v1@89.831,-11.5 ; v1@89.751,-11.6 ccw(c89.51,-11.841) 89.51,-11.5 cw(c89.51,-11.841) v1@89.751,-11.6 ; v1@89.751,-11.6 cw(c89.559,-11.792) 89.831,-11.792 ccw(c89.559,-11.792) v1@89.751,-11.6 ; v1@89.831,-11.5 89.831,-15.488 92.018,-17.675 105.625,-17.675 107.796,-15.422 107.796,-13.161 109.457,-11.5 v1@113.831,-11.5 ; v1@113.751,-11.6 ccw(c113.51,-11.841) 113.51,-11.5 cw(c113.51,-11.841) v1@113.751,-11.6 ; v1@113.751,-11.6 cw(c113.559,-11.792) 113.831,-11.792 ccw(c113.559,-11.792) v1@113.751,-11.6 ; -102.265,-11.5 ccw(c-102.265,-11.055) -101.95,-11.37 cw(c-102.265,-11.055) -102.265,-11.5 ; -54.441,-11.5 ccw(c-54.441,-11.228) -54.249,-11.42 cw(c-54.441,-11.228) -54.441,-11.5 ; -30.441,-11.5 ccw(c-30.441,-11.228) -30.249,-11.42 cw(c-30.441,-11.228) -30.441,-11.5 ; -30.169,-11.841 cw(c-29.828,-11.841) -30.069,-11.6 ccw(c-29.828,-11.841) -30.169,-11.841 ; -6.441,-11.5 ccw(c-6.441,-11.228) -6.249,-11.42 cw(c-6.441,-11.228) -6.441,-11.5 ; -6.169,-11.841 cw(c-5.828,-11.841) -6.069,-11.6 ccw(c-5.828,-11.841) -6.169,-11.841 ; 17.559,-11.5 ccw(c17.559,-11.228) 17.751,-11.42 cw(c17.559,-11.228) 17.559,-11.5 ; 17.831,-11.841 cw(c18.172,-11.841) 17.931,-11.6 ccw(c18.172,-11.841) 17.831,-11.841 ; 41.559,-11.5 ccw(c41.559,-11.228) 41.751,-11.42 cw(c41.559,-11.228) 41.559,-11.5 ; 41.831,-11.841 cw(c42.172,-11.841) 41.931,-11.6 ccw(c42.172,-11.841) 41.831,-11.841 ; 65.559,-11.5 ccw(c65.559,-11.228) 65.751,-11.42 cw(c65.559,-11.228) 65.559,-11.5 ; 65.831,-11.841 cw(c66.172,-11.841) 65.931,-11.6 ccw(c66.172,-11.841) 65.831,-11.841 ; 89.559,-11.5 ccw(c89.559,-11.228) 89.751,-11.42 cw(c89.559,-11.228) 89.559,-11.5 ; 89.831,-11.841 cw(c90.172,-11.841) 89.931,-11.6 ccw(c90.172,-11.841) 89.831,-11.841 ; 113.559,-11.5 ccw(c113.559,-11.228) 113.751,-11.42 cw(c113.559,-11.228) 113.559,-11.5 ; 113.831,-11.841 cw(c114.172,-11.841) 113.931,-11.6 ccw(c114.172,-11.841) 113.831,-11.841 ; 137.51,-11.5 cw(c137.51,-11.841) 137.751,-11.6 ccw(c137.51,-11.841) 137.51,-11.5 ; 137.559,-11.5 ccw(c137.559,-11.228) 137.751,-11.42 cw(c137.559,-11.228) 137.559,-11.5
A2: P1.5 U1.15 U2.15 U3.15 U4.15 U5.15 U6.15 U7.15 U8.15 U9.15 U10.15 U11.15 U12.15 | length 467.2
  Top Layer w0.254: U1.15@-128.531,-12.15 v1(-127.113,-12.15) ; v1(-127.626,-27.853) -127.626,-20.389 -126.545,-19.308 -123.933,-19.308 v1(-123.806,-19.181) ; U2.15@-104.452,-12.15 v1(-102.826,-12.15) ; U3.15@-80.373,-12.15 v1@-78.797,-12.15 ; U4.15@-56.827,-12.15 -55.028,-12.15 v1(-54.997,-12.12) ; U5.15@-32.827,-12.15 -31.028,-12.15 v1(-30.997,-12.12) ; U6.15@-8.827,-12.15 -7.028,-12.15 v1(-6.997,-12.12) ; U7.15@15.173,-12.15 16.972,-12.15 v1(17.003,-12.12) ; U8.15@39.173,-12.15 40.972,-12.15 v1(41.003,-12.12) ; U9.15@63.173,-12.15 64.972,-12.15 v1(65.003,-12.12) ; U10.15@87.173,-12.15 88.972,-12.15 v1(89.003,-12.12) ; U11.15@111.173,-12.15 112.972,-12.15 v1(113.003,-12.12) ; U12.15@135.173,-12.15 136.972,-12.15 v1(137.003,-12.12) ; -127.626,-27.546 cw(c-127.933,-27.546) -127.716,-27.763 ccw(c-127.933,-27.546) -127.626,-27.546 ; -127.626,-27.546 ccw(c-127.32,-27.546) -127.536,-27.763 cw(c-127.32,-27.546) -127.626,-27.546 ; -127.419,-12.15 cw(c-127.419,-12.457) -127.203,-12.24 ccw(c-127.419,-12.457) -127.419,-12.15 ; -127.419,-12.15 ccw(c-127.419,-11.843) -127.203,-12.06 cw(c-127.419,-11.843) -127.419,-12.15 ; -124.419,-19.308 ccw(c-124.419,-18.568) v1@-123.896,-19.091 ; -124.419,-19.308 ccw(c-124.419,-18.568) v1@-123.896,-19.091 ; -124.419,-19.308 ccw(c-124.419,-18.568) v1@-123.896,-19.091 ; -103.132,-12.15 cw(c-103.132,-12.457) -102.915,-12.24 ccw(c-103.132,-12.457) -103.132,-12.15 ; -103.132,-12.15 ccw(c-103.132,-11.843) -102.915,-12.06 cw(c-103.132,-11.843) -103.132,-12.15 ; -79.215,-12.15 cw(c-79.215,-12.614) -78.887,-12.286 ccw(c-79.215,-12.614) -79.215,-12.15 ; -55.377,-12.15 ccw(c-55.377,-11.74) -55.087,-12.03 cw(c-55.377,-11.74) -55.377,-12.15 ; -31.377,-12.15 ccw(c-31.377,-11.74) -31.087,-12.03 cw(c-31.377,-11.74) -31.377,-12.15 ; -7.377,-12.15 ccw(c-7.377,-11.74) -7.087,-12.03 cw(c-7.377,-11.74) -7.377,-12.15 ; 16.623,-12.15 ccw(c16.623,-11.74) 16.913,-12.03 cw(c16.623,-11.74) 16.623,-12.15 ; 40.623,-12.15 ccw(c40.623,-11.74) 40.913,-12.03 cw(c40.623,-11.74) 40.623,-12.15 ; 64.623,-12.15 ccw(c64.623,-11.74) 64.913,-12.03 cw(c64.623,-11.74) 64.623,-12.15 ; 88.623,-12.15 ccw(c88.623,-11.74) 88.913,-12.03 cw(c88.623,-11.74) 88.623,-12.15 ; 112.623,-12.15 ccw(c112.623,-11.74) 112.913,-12.03 cw(c112.623,-11.74) 112.623,-12.15 ; 136.623,-12.15 ccw(c136.623,-11.74) 136.913,-12.03 cw(c136.623,-11.74) 136.623,-12.15
  Bottom Layer w0.254: v1(-127.626,-27.853) -126.266,-27.853 -121.255,-32.864 -104.669,-32.864 -103.602,-31.797 P1.5@-103.602,-30.248 ; v1(-127.113,-12.15) -127.113,-15.874 v1(-123.806,-19.181) -111.995,-19.181 -104.964,-12.15 v1(-102.826,-12.15) -102.826,-16.59 -101.461,-17.954 -86.664,-17.954 -80.905,-12.196 v1(-78.797,-12.196) -78.797,-16.438 -76.747,-18.488 -61.95,-18.488 -58.858,-15.396 -58.858,-13.212 -57.796,-12.15 -55.028,-12.15 v1(-54.997,-12.12) -54.997,-16.362 -52.947,-18.412 -37.873,-18.412 -34.858,-15.396 -34.858,-13.212 -33.796,-12.15 -31.028,-12.15 v1(-30.997,-12.12) -30.997,-16.362 -28.947,-18.412 -13.873,-18.412 -10.858,-15.396 -10.858,-13.212 -9.796,-12.15 -7.028,-12.15 v1(-6.997,-12.12) -6.997,-16.362 -4.947,-18.412 10.368,-18.412 13.142,-15.638 13.142,-13.212 14.204,-12.15 16.972,-12.15 v1(17.003,-12.12) 17.003,-16.362 19.053,-18.412 34.127,-18.412 37.142,-15.396 37.142,-13.212 38.204,-12.15 40.972,-12.15 v1(41.003,-12.12) 41.003,-16.362 43.053,-18.412 58.044,-18.412 61.142,-15.314 61.142,-13.212 62.204,-12.15 64.972,-12.15 v1(65.003,-12.12) 65.003,-16.362 67.053,-18.412 82.127,-18.412 85.142,-15.396 85.142,-13.212 86.204,-12.15 88.972,-12.15 v1(89.003,-12.12) 89.003,-16.362 91.053,-18.412 106.278,-18.412 109.142,-15.548 109.142,-13.212 110.204,-12.15 112.972,-12.15 v1(113.003,-12.12) 113.003,-16.362 115.053,-18.412 130.127,-18.412 133.142,-15.396 133.142,-13.212 134.204,-12.15 136.972,-12.15 v1(137.003,-12.12) ; v1@-127.536,-27.942 cw(c-127.32,-28.159) -127.32,-27.853 ; v1@-127.536,-27.942 cw(c-127.32,-28.159) -127.32,-27.853 ; v1@-127.536,-27.942 cw(c-127.32,-28.159) -127.32,-27.853 ; v1@-127.536,-27.763 ccw(c-127.32,-27.546) -127.32,-27.853 ; v1@-127.536,-27.763 ccw(c-127.32,-27.546) -127.32,-27.853 ; v1@-127.536,-27.763 ccw(c-127.32,-27.546) -127.32,-27.853 ; -127.113,-12.457 cw(c-126.806,-12.457) -127.023,-12.24 ccw(c-126.806,-12.457) -127.113,-12.457 ; -127.113,-12.457 ccw(c-127.419,-12.457) -127.203,-12.24 cw(c-127.419,-12.457) -127.113,-12.457 ; -124.023,-18.964 cw(c-124.24,-19.181) v1@-123.933,-19.181 ; -124.023,-18.964 ccw(c-123.806,-18.747) v1@-123.806,-19.054 ; -124.023,-18.964 cw(c-124.24,-19.181) v1@-123.933,-19.181 ; -124.023,-18.964 ccw(c-123.806,-18.747) v1@-123.806,-19.054 ; -124.023,-18.964 ccw(c-123.806,-18.747) v1@-123.806,-19.054 ; -124.023,-18.964 cw(c-124.24,-19.181) v1@-123.933,-19.181 ; v1@-123.716,-19.271 cw(c-123.499,-19.488) -123.499,-19.181 ; v1@-123.716,-19.271 cw(c-123.499,-19.488) -123.499,-19.181 ; v1@-123.716,-19.271 cw(c-123.499,-19.488) -123.499,-19.181 ; v1@-123.716,-19.091 ccw(c-123.499,-18.874) -123.499,-19.181 ; v1@-123.716,-19.091 ccw(c-123.499,-18.874) -123.499,-19.181 ; v1@-123.716,-19.091 ccw(c-123.499,-18.874) -123.499,-19.181 ; P1.5@-104.042,-30.689 cw(c-105.106,-31.752) -103.602,-31.752 ; P1.5@-104.042,-30.689 cw(c-105.106,-31.752) -103.602,-31.752 ; P1.5@-104.042,-30.689 cw(c-105.106,-31.752) -103.602,-31.752 ; P1.5@-103.863,-30.509 cw(c-104.493,-31.139) -103.602,-31.139 ; P1.5@-103.863,-30.509 cw(c-104.493,-31.139) -103.602,-31.139 ; P1.5@-103.863,-30.509 cw(c-104.493,-31.139) -103.602,-31.139 ; -103.602,-31.752 cw(c-102.098,-31.752) P1.5@-103.161,-30.689 ; -103.602,-31.752 cw(c-102.098,-31.752) P1.5@-103.161,-30.689 ; -103.602,-31.752 cw(c-102.098,-31.752) P1.5@-103.161,-30.689 ; -103.602,-31.139 cw(c-102.711,-31.139) P1.5@-103.341,-30.509 ; -103.602,-31.139 cw(c-102.711,-31.139) P1.5@-103.341,-30.509 ; -103.602,-31.139 cw(c-102.711,-31.139) P1.5@-103.341,-30.509 ; -103.132,-12.15 cw(c-103.132,-12.457) v1@-102.915,-12.24 ; -103.132,-12.15 ccw(c-103.132,-11.843) -102.915,-12.06 cw(c-103.132,-11.843) -103.132,-12.15 ; -103.132,-12.15 cw(c-103.132,-12.457) v1@-102.915,-12.24 ; v1@-102.915,-12.24 cw(c-103.132,-12.457) -102.826,-12.457 ; v1@-102.915,-12.24 cw(c-103.132,-12.457) -102.826,-12.457 ; -102.826,-12.457 cw(c-102.519,-12.457) -102.736,-12.24 ccw(c-102.519,-12.457) -102.826,-12.457 ; -79.104,-12.196 cw(c-79.104,-12.503) v1@-78.887,-12.286 ; -79.104,-12.196 ccw(c-79.104,-11.889) -78.887,-12.106 cw(c-79.104,-11.889) -79.104,-12.196 ; -79.104,-12.196 cw(c-79.104,-12.503) v1@-78.887,-12.286 ; v1@-78.887,-12.286 cw(c-79.104,-12.503) -78.797,-12.503 ; v1@-78.887,-12.286 cw(c-79.104,-12.503) -78.797,-12.503 ; v1@-78.887,-12.286 cw(c-79.104,-12.503) -78.797,-12.503 ; -78.797,-12.503 cw(c-78.491,-12.503) v1@-78.707,-12.286 ; -78.797,-12.503 cw(c-78.491,-12.503) v1@-78.707,-12.286 ; -78.797,-12.503 cw(c-78.491,-12.503) v1@-78.707,-12.286 ; -54.997,-12.426 cw(c-54.691,-12.426) -54.908,-12.21 ccw(c-54.691,-12.426) -54.997,-12.426 ; -54.997,-12.426 ccw(c-55.304,-12.426) -55.087,-12.21 cw(c-55.304,-12.426) -54.997,-12.426 ; -30.997,-12.426 cw(c-30.691,-12.426) -30.908,-12.21 ccw(c-30.691,-12.426) -30.997,-12.426 ; -30.997,-12.426 ccw(c-31.304,-12.426) -31.087,-12.21 cw(c-31.304,-12.426) -30.997,-12.426 ; -6.997,-12.426 cw(c-6.691,-12.426) -6.908,-12.21 ccw(c-6.691,-12.426) -6.997,-12.426 ; -6.997,-12.426 ccw(c-7.304,-12.426) -7.087,-12.21 cw(c-7.304,-12.426) -6.997,-12.426 ; 17.003,-12.426 cw(c17.309,-12.426) 17.092,-12.21 ccw(c17.309,-12.426) 17.003,-12.426 ; 17.003,-12.426 ccw(c16.696,-12.426) 16.913,-12.21 cw(c16.696,-12.426) 17.003,-12.426 ; 41.003,-12.426 cw(c41.309,-12.426) 41.092,-12.21 ccw(c41.309,-12.426) 41.003,-12.426 ; 41.003,-12.426 ccw(c40.696,-12.426) 40.913,-12.21 cw(c40.696,-12.426) 41.003,-12.426 ; 65.003,-12.426 cw(c65.309,-12.426) 65.092,-12.21 ccw(c65.309,-12.426) 65.003,-12.426 ; 65.003,-12.426 ccw(c64.696,-12.426) 64.913,-12.21 cw(c64.696,-12.426) 65.003,-12.426 ; 89.003,-12.426 cw(c89.309,-12.426) 89.092,-12.21 ccw(c89.309,-12.426) 89.003,-12.426 ; 89.003,-12.426 ccw(c88.696,-12.426) 88.913,-12.21 cw(c88.696,-12.426) 89.003,-12.426 ; 113.003,-12.426 cw(c113.309,-12.426) 113.092,-12.21 ccw(c113.309,-12.426) 113.003,-12.426 ; 113.003,-12.426 ccw(c112.696,-12.426) 112.913,-12.21 cw(c112.696,-12.426) 113.003,-12.426 ; -55.377,-12.15 ccw(c-55.377,-11.74) -55.087,-12.03 cw(c-55.377,-11.74) -55.377,-12.15 ; -31.377,-12.15 ccw(c-31.377,-11.74) -31.087,-12.03 cw(c-31.377,-11.74) -31.377,-12.15 ; -7.377,-12.15 ccw(c-7.377,-11.74) -7.087,-12.03 cw(c-7.377,-11.74) -7.377,-12.15 ; 16.623,-12.15 ccw(c16.623,-11.74) 16.913,-12.03 cw(c16.623,-11.74) 16.623,-12.15 ; 40.623,-12.15 ccw(c40.623,-11.74) 40.913,-12.03 cw(c40.623,-11.74) 40.623,-12.15 ; 64.623,-12.15 ccw(c64.623,-11.74) 64.913,-12.03 cw(c64.623,-11.74) 64.623,-12.15 ; 88.623,-12.15 ccw(c88.623,-11.74) 88.913,-12.03 cw(c88.623,-11.74) 88.623,-12.15 ; 112.623,-12.15 ccw(c112.623,-11.74) 112.913,-12.03 cw(c112.623,-11.74) 112.623,-12.15 ; 136.623,-12.15 ccw(c136.623,-11.74) 136.913,-12.03 cw(c136.623,-11.74) 136.623,-12.15
CH1: P1.2 U1.8 | length 45.9
  Top Layer w0.254: v1(-134.982,-18.419) -134.982,-16.101 U1.8@-134.931,-16.05 ; v1@-135.072,-18.329 ccw(c-135.289,-18.112) -134.982,-18.112 ; v1@-135.072,-18.329 ccw(c-135.289,-18.112) -134.982,-18.112 ; v1@-135.072,-18.329 ccw(c-135.289,-18.112) -134.982,-18.112 ; -134.982,-18.112 ccw(c-134.675,-18.112) v1@-134.892,-18.329 ; -134.982,-18.112 ccw(c-134.675,-18.112) v1@-134.892,-18.329 ; -134.982,-18.112 ccw(c-134.675,-18.112) v1@-134.892,-18.329 ; -134.982,-16.228 cw(c-134.753,-16.228) -134.915,-16.066 ccw(c-134.753,-16.228) -134.982,-16.228
  Bottom Layer w0.254: v1(-134.982,-18.419) -127.42,-25.981 -122.779,-25.981 -121.179,-27.581 P1.2@-108.682,-27.581 ; v1@-134.982,-18.546 cw(c-134.982,-18.853) -134.765,-18.636 ; v1@-134.982,-18.546 cw(c-134.982,-18.853) -134.765,-18.636 ; v1@-134.982,-18.546 cw(c-134.982,-18.853) -134.765,-18.636 ; v1@-134.855,-18.419 ccw(c-134.548,-18.419) -134.765,-18.636 ; v1@-134.855,-18.419 ccw(c-134.548,-18.419) -134.765,-18.636 ; v1@-134.855,-18.419 ccw(c-134.548,-18.419) -134.765,-18.636 ; -110.492,-27.581 cw(c-110.492,-29.519) P1.2@-109.122,-28.149 ; -110.492,-27.581 cw(c-110.492,-29.519) P1.2@-109.122,-28.149 ; -110.492,-27.581 cw(c-110.492,-29.519) P1.2@-109.122,-28.149 ; -109.879,-27.581 cw(c-109.879,-28.905) P1.2@-108.943,-27.969 ; -109.879,-27.581 ccw(c-109.879,-26.511) P1.2@-109.122,-27.267 ; -109.879,-27.581 cw(c-109.879,-28.905) P1.2@-108.943,-27.969 ; -109.879,-27.581 ccw(c-109.879,-26.511) P1.2@-109.122,-27.267 ; -109.879,-27.581 ccw(c-109.879,-26.511) P1.2@-109.122,-27.267 ; -109.879,-27.581 cw(c-109.879,-28.905) P1.2@-108.943,-27.969
CH1-1: D1.1 R1.2 U1.4 | length 32
  Top Layer w0.254: v1(-140.758,-9.628) -136.935,-13.45 U1.4@-134.931,-13.45 ; v1@-140.758,-9.755 cw(c-140.758,-10.061) -140.541,-9.844 ; v1@-140.758,-9.755 cw(c-140.758,-10.061) -140.541,-9.844 ; v1@-140.758,-9.755 cw(c-140.758,-10.061) -140.541,-9.844 ; v1@-140.631,-9.628 ccw(c-140.324,-9.628) -140.541,-9.844 ; v1@-140.631,-9.628 ccw(c-140.324,-9.628) -140.541,-9.844 ; v1@-140.631,-9.628 ccw(c-140.324,-9.628) -140.541,-9.844
  Bottom Layer w0.254: v1(-140.758,-9.628) -140.75,-9.62 v1(-140.75,-1.8) ; D1.1@-141.226,-2.276 cw(c-142.375,-3.425) -140.75,-3.425 ; D1.1@-141.226,-2.276 cw(c-142.375,-3.425) -140.75,-3.425 ; D1.1@-141.226,-2.276 cw(c-142.375,-3.425) -140.75,-3.425 ; D1.1@-141.046,-2.096 cw(c-141.762,-2.812) -140.75,-2.812 ; D1.1@-141.046,-2.096 cw(c-141.762,-2.812) -140.75,-2.812 ; D1.1@-141.046,-2.096 cw(c-141.762,-2.812) -140.75,-2.812 ; v1@-140.848,-9.538 ccw(c-141.084,-9.302) -140.75,-9.302 ; v1@-140.848,-9.538 ccw(c-141.084,-9.302) -140.75,-9.302 ; v1@-140.848,-9.538 ccw(c-141.084,-9.302) -140.75,-9.302 ; D1.1@-140.84,-1.89 cw(c-141.057,-2.107) D1.1@-140.75,-2.107 ; D1.1@-140.84,-1.89 cw(c-141.057,-2.107) D1.1@-140.75,-2.107 ; D1.1@-140.84,-1.89 cw(c-141.057,-2.107) D1.1@-140.75,-2.107 ; -140.75,-9.34 ccw(c-140.47,-9.34) v1@-140.668,-9.538 ; -140.75,-9.34 ccw(c-140.47,-9.34) v1@-140.668,-9.538 ; -140.75,-9.34 ccw(c-140.47,-9.34) v1@-140.668,-9.538 ; -140.75,-3.425 cw(c-139.125,-3.425) D1.1@-140.274,-2.276 ; -140.75,-3.425 cw(c-139.125,-3.425) D1.1@-140.274,-2.276 ; -140.75,-3.425 cw(c-139.125,-3.425) D1.1@-140.274,-2.276 ; -140.75,-2.812 cw(c-139.738,-2.812) D1.1@-140.454,-2.096 ; -140.75,-2.812 cw(c-139.738,-2.812) D1.1@-140.454,-2.096 ; -140.75,-2.812 cw(c-139.738,-2.812) D1.1@-140.454,-2.096 ; D1.1@-140.75,-2.107 cw(c-140.443,-2.107) D1.1@-140.66,-1.89 ; D1.1@-140.75,-2.107 cw(c-140.443,-2.107) D1.1@-140.66,-1.89 ; D1.1@-140.75,-2.107 cw(c-140.443,-2.107) D1.1@-140.66,-1.89
CH1-2: D2.1 R2.2 U1.5 | length 35.2
  Top Layer w0.254: v1(-141.078,-12.171) -139.579,-12.171 -137.65,-14.1 U1.5@-134.931,-14.1 ; v1@-140.988,-12.26 cw(c-140.771,-12.477) -140.771,-12.171 ; v1@-140.988,-12.26 cw(c-140.771,-12.477) -140.771,-12.171 ; v1@-140.988,-12.26 cw(c-140.771,-12.477) -140.771,-12.171 ; v1@-140.988,-12.081 ccw(c-140.771,-11.864) -140.771,-12.171 ; v1@-140.988,-12.081 ccw(c-140.771,-11.864) -140.771,-12.171 ; v1@-140.988,-12.081 ccw(c-140.771,-11.864) -140.771,-12.171
  Bottom Layer w0.254: v1(-141.078,-12.171) -138.25,-9.343 D2.1@-138.25,-1.8 ; v1@-141.078,-12.044 ccw(c-141.078,-11.737) -140.861,-11.954 ; v1@-141.078,-12.044 ccw(c-141.078,-11.737) -140.861,-11.954 ; v1@-141.078,-12.044 ccw(c-141.078,-11.737) -140.861,-11.954 ; v1@-140.951,-12.171 cw(c-140.644,-12.171) -140.861,-11.954 ; v1@-140.951,-12.171 cw(c-140.644,-12.171) -140.861,-11.954 ; v1@-140.951,-12.171 cw(c-140.644,-12.171) -140.861,-11.954 ; D2.1@-138.726,-2.276 cw(c-139.875,-3.425) -138.25,-3.425 ; D2.1@-138.726,-2.276 cw(c-139.875,-3.425) -138.25,-3.425 ; D2.1@-138.726,-2.276 cw(c-139.875,-3.425) -138.25,-3.425 ; D2.1@-138.546,-2.096 cw(c-139.262,-2.812) -138.25,-2.812 ; D2.1@-138.546,-2.096 cw(c-139.262,-2.812) -138.25,-2.812 ; D2.1@-138.546,-2.096 cw(c-139.262,-2.812) -138.25,-2.812 ; D2.1@-138.348,-1.89 cw(c-138.584,-2.126) D2.1@-138.25,-2.126 ; D2.1@-138.348,-1.89 cw(c-138.584,-2.126) D2.1@-138.25,-2.126 ; D2.1@-138.348,-1.89 cw(c-138.584,-2.126) D2.1@-138.25,-2.126 ; -138.25,-3.425 cw(c-136.625,-3.425) D2.1@-137.774,-2.276 ; -138.25,-3.425 cw(c-136.625,-3.425) D2.1@-137.774,-2.276 ; -138.25,-3.425 cw(c-136.625,-3.425) D2.1@-137.774,-2.276 ; -138.25,-2.812 cw(c-137.238,-2.812) D2.1@-137.954,-2.096 ; -138.25,-2.812 cw(c-137.238,-2.812) D2.1@-137.954,-2.096 ; -138.25,-2.812 cw(c-137.238,-2.812) D2.1@-137.954,-2.096 ; D2.1@-138.25,-2.088 cw(c-137.97,-2.088) D2.1@-138.168,-1.89 ; D2.1@-138.25,-2.088 cw(c-137.97,-2.088) D2.1@-138.168,-1.89 ; D2.1@-138.25,-2.088 cw(c-137.97,-2.088) D2.1@-138.168,-1.89
  other v1: -138.258,-1.8
CH1-3: D3.1 R3.2 U1.6 | length 35.9
  Top Layer w0.254: v1(-140.621,-14.38) -140.621,-14.609 -140.48,-14.75 U1.6@-134.931,-14.75
  Bottom Layer w0.254: v1(-140.621,-14.38) -140.621,-13.517 -135.75,-8.646 v1(-135.75,-1.8) ; v1@-140.711,-14.291 ccw(c-140.927,-14.074) -140.621,-14.074 ; v1@-140.711,-14.291 ccw(c-140.927,-14.074) -140.621,-14.074 ; v1@-140.711,-14.291 ccw(c-140.927,-14.074) -140.621,-14.074 ; -140.621,-14.074 ccw(c-140.314,-14.074) v1@-140.531,-14.291 ; -140.621,-14.074 ccw(c-140.314,-14.074) v1@-140.531,-14.291 ; -140.621,-14.074 ccw(c-140.314,-14.074) v1@-140.531,-14.291 ; D3.1@-136.226,-2.276 cw(c-137.375,-3.425) -135.75,-3.425 ; D3.1@-136.226,-2.276 cw(c-137.375,-3.425) -135.75,-3.425 ; D3.1@-136.226,-2.276 cw(c-137.375,-3.425) -135.75,-3.425 ; D3.1@-136.046,-2.096 cw(c-136.762,-2.812) -135.75,-2.812 ; D3.1@-136.046,-2.096 cw(c-136.762,-2.812) -135.75,-2.812 ; D3.1@-136.046,-2.096 cw(c-136.762,-2.812) -135.75,-2.812 ; D3.1@-135.84,-1.89 cw(c-136.057,-2.107) D3.1@-135.75,-2.107 ; D3.1@-135.84,-1.89 cw(c-136.057,-2.107) D3.1@-135.75,-2.107 ; D3.1@-135.84,-1.89 cw(c-136.057,-2.107) D3.1@-135.75,-2.107 ; -135.75,-3.425 cw(c-134.125,-3.425) D3.1@-135.274,-2.276 ; -135.75,-3.425 cw(c-134.125,-3.425) D3.1@-135.274,-2.276 ; -135.75,-3.425 cw(c-134.125,-3.425) D3.1@-135.274,-2.276 ; -135.75,-2.812 cw(c-134.738,-2.812) D3.1@-135.454,-2.096 ; -135.75,-2.812 cw(c-134.738,-2.812) D3.1@-135.454,-2.096 ; -135.75,-2.812 cw(c-134.738,-2.812) D3.1@-135.454,-2.096 ; D3.1@-135.75,-2.107 cw(c-135.443,-2.107) D3.1@-135.66,-1.89 ; D3.1@-135.75,-2.107 cw(c-135.443,-2.107) D3.1@-135.66,-1.89 ; D3.1@-135.75,-2.107 cw(c-135.443,-2.107) D3.1@-135.66,-1.89
CH1-4: D4.1 R4.2 U1.7 | length 38.7
  Top Layer w0.254: v1(-138.817,-16.237) -137.981,-15.4 U1.7@-134.931,-15.4 ; v1@-138.817,-16.11 ccw(c-138.817,-15.803) -138.601,-16.02 ; v1@-138.817,-16.11 ccw(c-138.817,-15.803) -138.601,-16.02 ; v1@-138.817,-16.11 ccw(c-138.817,-15.803) -138.601,-16.02 ; v1@-138.69,-16.237 cw(c-138.384,-16.237) -138.601,-16.02 ; v1@-138.69,-16.237 cw(c-138.384,-16.237) -138.601,-16.02 ; v1@-138.69,-16.237 cw(c-138.384,-16.237) -138.601,-16.02
  Bottom Layer w0.254: v1(-138.817,-16.237) -138.556,-16.237 -133.25,-10.931 v1(-133.25,-1.8) ; v1@-138.817,-16.11 ccw(c-138.817,-15.172) -138.155,-15.835 ; v1@-138.817,-16.11 ccw(c-138.817,-15.172) -138.155,-15.835 ; v1@-138.817,-16.11 ccw(c-138.817,-15.172) -138.155,-15.835 ; D4.1@-133.726,-2.276 cw(c-134.875,-3.425) -133.25,-3.425 ; D4.1@-133.726,-2.276 cw(c-134.875,-3.425) -133.25,-3.425 ; D4.1@-133.726,-2.276 cw(c-134.875,-3.425) -133.25,-3.425 ; D4.1@-133.546,-2.096 cw(c-134.262,-2.812) -133.25,-2.812 ; D4.1@-133.546,-2.096 cw(c-134.262,-2.812) -133.25,-2.812 ; D4.1@-133.546,-2.096 cw(c-134.262,-2.812) -133.25,-2.812 ; D4.1@-133.34,-1.89 cw(c-133.557,-2.107) D4.1@-133.25,-2.107 ; D4.1@-133.34,-1.89 cw(c-133.557,-2.107) D4.1@-133.25,-2.107 ; D4.1@-133.34,-1.89 cw(c-133.557,-2.107) D4.1@-133.25,-2.107 ; -133.25,-3.425 cw(c-131.625,-3.425) D4.1@-132.774,-2.276 ; -133.25,-3.425 cw(c-131.625,-3.425) D4.1@-132.774,-2.276 ; -133.25,-3.425 cw(c-131.625,-3.425) D4.1@-132.774,-2.276 ; -133.25,-2.812 cw(c-132.238,-2.812) D4.1@-132.954,-2.096 ; -133.25,-2.812 cw(c-132.238,-2.812) D4.1@-132.954,-2.096 ; -133.25,-2.812 cw(c-132.238,-2.812) D4.1@-132.954,-2.096 ; D4.1@-133.25,-2.107 cw(c-132.943,-2.107) D4.1@-133.16,-1.89 ; D4.1@-133.25,-2.107 cw(c-132.943,-2.107) D4.1@-133.16,-1.89 ; D4.1@-133.25,-2.107 cw(c-132.943,-2.107) D4.1@-133.16,-1.89
CH1-5: D5.1 R5.2 U1.12 | length 34.3
  Top Layer w0.254: U1.12@-128.531,-14.1 -125.126,-14.1 v1(-125.101,-14.076) ; -125.467,-14.1 ccw(c-125.467,-13.71) v1@-125.191,-13.986 ; -125.467,-14.1 ccw(c-125.467,-13.71) v1@-125.191,-13.986 ; -125.467,-14.1 ccw(c-125.467,-13.71) v1@-125.191,-13.986
  Bottom Layer w0.254: D5.1@-130.75,-1.8 -130.75,-5.481 -125.101,-11.129 v1(-125.101,-14.076) ; D5.1@-131.226,-2.276 cw(c-132.375,-3.425) -130.75,-3.425 ; D5.1@-131.226,-2.276 cw(c-132.375,-3.425) -130.75,-3.425 ; D5.1@-131.226,-2.276 cw(c-132.375,-3.425) -130.75,-3.425 ; D5.1@-131.046,-2.096 cw(c-131.762,-2.812) -130.75,-2.812 ; D5.1@-131.046,-2.096 cw(c-131.762,-2.812) -130.75,-2.812 ; D5.1@-131.046,-2.096 cw(c-131.762,-2.812) -130.75,-2.812 ; D5.1@-130.848,-1.89 cw(c-131.084,-2.126) D5.1@-130.75,-2.126 ; D5.1@-130.848,-1.89 cw(c-131.084,-2.126) D5.1@-130.75,-2.126 ; D5.1@-130.848,-1.89 cw(c-131.084,-2.126) D5.1@-130.75,-2.126 ; -130.75,-3.425 cw(c-129.125,-3.425) D5.1@-130.274,-2.276 ; -130.75,-3.425 cw(c-129.125,-3.425) D5.1@-130.274,-2.276 ; -130.75,-3.425 cw(c-129.125,-3.425) D5.1@-130.274,-2.276 ; -130.75,-2.812 cw(c-129.738,-2.812) D5.1@-130.454,-2.096 ; -130.75,-2.812 cw(c-129.738,-2.812) D5.1@-130.454,-2.096 ; -130.75,-2.812 cw(c-129.738,-2.812) D5.1@-130.454,-2.096 ; D5.1@-130.75,-2.088 cw(c-130.47,-2.088) D5.1@-130.668,-1.89 ; D5.1@-130.75,-2.088 cw(c-130.47,-2.088) D5.1@-130.668,-1.89 ; D5.1@-130.75,-2.088 cw(c-130.47,-2.088) D5.1@-130.668,-1.89 ; v1@-125.191,-13.986 ccw(c-125.408,-13.769) -125.101,-13.769 ; v1@-125.191,-13.986 ccw(c-125.408,-13.769) -125.101,-13.769 ; v1@-125.191,-13.986 ccw(c-125.408,-13.769) -125.101,-13.769 ; -125.101,-13.769 ccw(c-124.795,-13.769) v1@-125.012,-13.986 ; -125.101,-13.769 ccw(c-124.795,-13.769) v1@-125.012,-13.986 ; -125.101,-13.769 ccw(c-124.795,-13.769) v1@-125.012,-13.986
  other v1: -130.758,-1.8
CH1-6: D6.1 R6.2 U1.11 | length 35.8
  Top Layer w0.254: U1.11@-128.531,-14.75 -126.357,-14.75 -125.863,-15.244 -123.831,-15.244 v1(-123.476,-14.888)
  Bottom Layer w0.254: D6.1@-128.25,-1.8 -128.25,-5.644 -123.476,-10.418 v1(-123.476,-14.888) ; D6.1@-128.726,-2.276 cw(c-129.875,-3.425) -128.25,-3.425 ; D6.1@-128.726,-2.276 cw(c-129.875,-3.425) -128.25,-3.425 ; D6.1@-128.726,-2.276 cw(c-129.875,-3.425) -128.25,-3.425 ; D6.1@-128.546,-2.096 cw(c-129.262,-2.812) -128.25,-2.812 ; D6.1@-128.546,-2.096 cw(c-129.262,-2.812) -128.25,-2.812 ; D6.1@-128.546,-2.096 cw(c-129.262,-2.812) -128.25,-2.812 ; D6.1@-128.348,-1.89 cw(c-128.584,-2.126) D6.1@-128.25,-2.126 ; D6.1@-128.348,-1.89 cw(c-128.584,-2.126) D6.1@-128.25,-2.126 ; D6.1@-128.348,-1.89 cw(c-128.584,-2.126) D6.1@-128.25,-2.126 ; -128.25,-3.425 cw(c-126.625,-3.425) D6.1@-127.774,-2.276 ; -128.25,-3.425 cw(c-126.625,-3.425) D6.1@-127.774,-2.276 ; -128.25,-3.425 cw(c-126.625,-3.425) D6.1@-127.774,-2.276 ; -128.25,-2.812 cw(c-127.238,-2.812) D6.1@-127.954,-2.096 ; -128.25,-2.812 cw(c-127.238,-2.812) D6.1@-127.954,-2.096 ; -128.25,-2.812 cw(c-127.238,-2.812) D6.1@-127.954,-2.096 ; D6.1@-128.25,-2.087 cw(c-127.97,-2.087) D6.1@-128.168,-1.89 ; D6.1@-128.25,-2.087 cw(c-127.97,-2.087) D6.1@-128.168,-1.89 ; D6.1@-128.25,-2.087 cw(c-127.97,-2.087) D6.1@-128.168,-1.89 ; v1@-123.566,-14.799 ccw(c-123.782,-14.582) -123.476,-14.582 ; v1@-123.566,-14.799 ccw(c-123.782,-14.582) -123.476,-14.582 ; v1@-123.566,-14.799 ccw(c-123.782,-14.582) -123.476,-14.582 ; -123.476,-14.582 ccw(c-123.169,-14.582) v1@-123.386,-14.799 ; -123.476,-14.582 ccw(c-123.169,-14.582) v1@-123.386,-14.799 ; -123.476,-14.582 ccw(c-123.169,-14.582) v1@-123.386,-14.799
  other v1: -128.258,-1.8